# Allegro board LAYOUT.brd
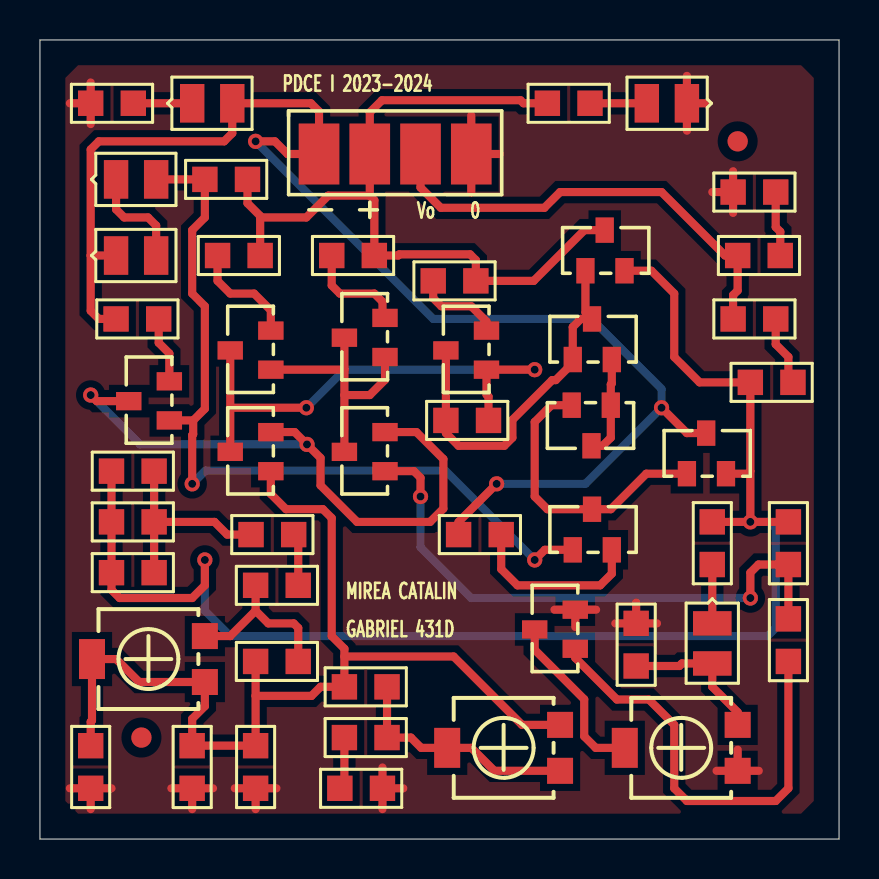
[diagram p0: board, top side]
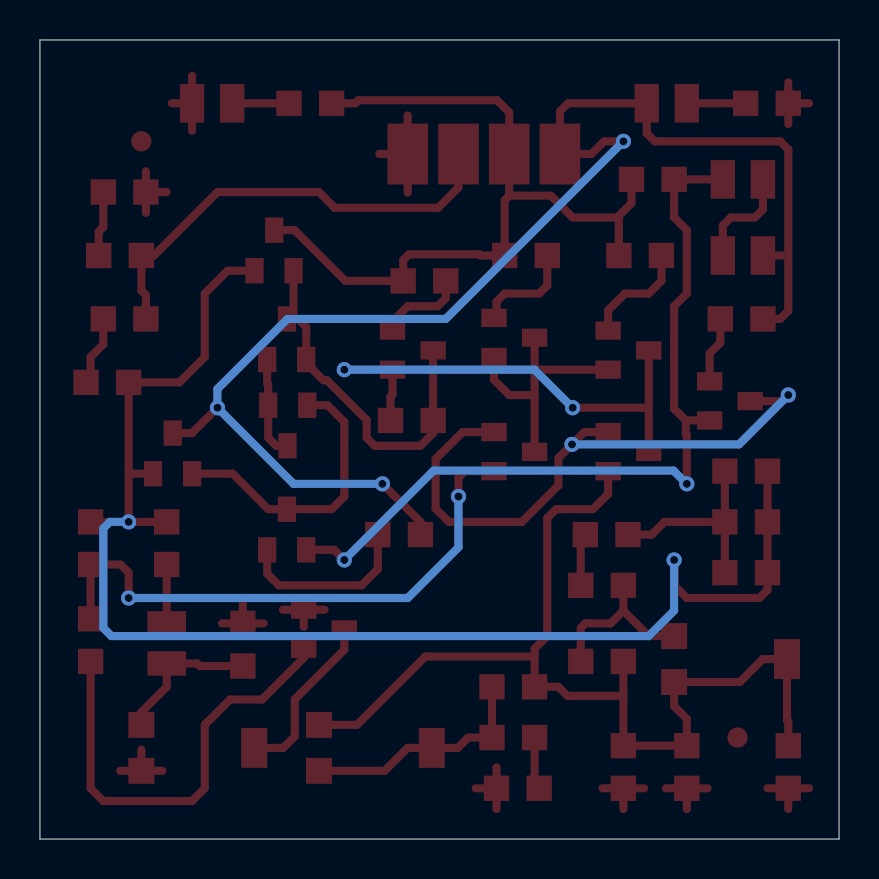
[diagram p1: board, bottom side, seen from below]

Outline 40 x 40 mm; copper layers: TOP, BOTTOM. Coordinates in mm from the lower left corner of the outline.
Outline path: 0,40 40,40 40,0 0,0 0,40

## Design rules (mm)
constraint set DEFAULT: min track width 0.406
nets with their own width: min track width 0.406; nets 0 INM INP VCC

## Placement (name value [footprint] x y rotation side)
C1  1n  [SMC0805]  5.71 18.41 180 top
C2  1n  [SMC0805]  20.32 20.95 0 top
C3  1n  [SMC0805]  7.62 2.54 90 top
C4  1n  [SMC0805]  5.71 15.88 180 top
C5  1n  [SMC0805]  5.71 13.34 180 top
C6  1n  [SMC0805]  2.54 2.54 90 top
C7  1n  [SMC0805]  10.79 2.54 90 top
C77  1u  [SMC0805]  29.84 10.79 270 top
D5  1N4148  [SMD0805]  33.66 10.79 270 top
J1  CON4  [JUMPER4]  13.97 34.29 0 top
LED  1N4148  [SMD0805]  32.38 36.83 180 top
LED1  1N4148  [SMD0805]  7.62 36.83 0 top
NOREF  -  [unnamed]  34.92 34.92 0 top
NOREF#2  -  [#2]  0 0 90 top
NOREF#3  -  [#2]  40 0 90 top
NOREF#4  -  [#2]  0 0 0 top
NOREF#5  -  [unnamed]  5.08 5.08 0 top
NOREF#6  -  [#2]  0 40 0 top
P1  500k  [TS53YL]  34.92 5.71 0 top
P2  10k  [TS53YL]  26.04 5.71 0 top
P3  10k  [TS53YL]  8.26 10.16 0 top
Q10  QBC846B  [TO236]  26.67 14.61 270 top
Q11  QBC846B  [TO236]  28.57 21.59 90 top
Q12  QBC846B  [TO236]  26.67 24.13 270 top
Q14  QBC846B  [TO236]  11.43 18.41 0 top
Q15  QBC846B  [TO236]  6.35 20.95 0 top
Q16  QBC846B  [TO236]  17.14 18.41 0 top
Q17  QBC856B  [TO236]  17.14 24.13 0 top
Q18  QBC856B  [TO236]  11.43 23.5 0 top
Q19  QBC856B  [TO236]  22.23 23.5 0 top
Q20  QBC856B  [TO236]  32.38 18.41 270 top
Q22  QBC846B  [TO236]  27.3 28.57 270 top
R1  510  [SMR0805]  12.7 15.24 180 top
R2  22k  [SMR0805]  37.47 15.88 270 top
R3  380  [SMR0805]  3.81 26.04 0 top
R4  3.9k  [SMR0805]  8.26 33.02 0 top
R5  51  [SMR0805]  20.95 15.24 0 top
R14  51  [SMR0805]  8.89 29.21 0 top
R15  51  [SMR0805]  14.61 29.21 0 top
R16  510  [SMR0805]  15.24 5.08 0 top
R17  10k  [SMR0805]  37.47 8.89 90 top
R38  1k  [SMR0805]  33.66 15.88 270 top
R39  51  [SMR0805]  19.68 27.94 0 top
R40  6.8k  [SMR0805]  10.79 8.89 0 top
R41  6.8k  [SMR0805]  15.24 7.62 0 top
R42  100  [SMR0805]  17.14 2.54 180 top
R43  100  [SMR0805]  10.79 12.7 0 top
RD1  100  [SMR0805]  25.4 36.83 0 top
RD2  100  [SMR0805]  2.54 36.83 0 top
RL  22k  [SMR0805]  34.92 29.21 0 top
RL2  3.3k  [SMR0805]  36.83 32.38 180 top
RZ  68k  [SMR0805]  36.83 26.04 180 top
RZ1  22k  [SMR0805]  35.56 22.86 0 top
TA  JMMBFJ309LT1  [TO236]  26.67 9.53 0 top
U1  1N4148  [SMD0805]  3.81 33.02 0 top
U2  1N4148  [SMD0805]  3.81 29.21 0 top

## Library data of the parts
C1-C7 C77 = C
D5 LED LED1 U1 U2 = 1N4148_0
J1 = CON4: User Part Number: ***
P1-P3 = POT
Q10-Q12 Q14-Q16 Q22 = QBC846B_0
Q17-Q20 = QBC856B_0
R1-R5 R14-R17 R38-R43 RD1 RD2 RL RL2 RZ RZ1 = R
TA = JMMBFJ309LT1_0

## Footprints (pads in the part's own frame, mm; a bottom-side part is the same pattern mirrored in y, then rotated)
JUMPER4
  rect 2.032x3.048 smd: 1(0,0) 2(2.54,0) 3(5.08,0) 4(7.62,0)
SMC0805
  rect 1.27x1.27 smd: 1(0,0) 2(2.134,0)
SMD0805
  rect 1.219x1.93 smd: A(2.007,0) C(0,0)
SMR0805
  rect 1.27x1.27 smd: 1(0,0) 2(2.134,0)
TO236
  rect 1.27x0.914 smd: 1(0.127,0) 2(0.127,1.956) 3(-1.905,0.965)
TS53YL
  rect 1.3x1.3 smd: 1(0,0) 3(0,-2.3)
  rect 1.3x2 smd: 2(-5.65,-1.15)
unnamed
  round 1.016 smd: (0,0)

## Nets
VCC: J1.2 Q22.3 R4.2 R14.2 R15.2 R39.2 RD1.1
VEE: J1.1 LED1.A Q20.3 R3.1 R5.1 U2.C(2)
0: C3.1 C6.1 C7.1 C77.1 J1.4 LED.C(2) P1.3 R42.1 RD2.1 RL2.2 TA.2
INM: Q16.1 R2.2 R17.2
INP: C3.2 C6.2 C7.2 P2.1 P3.2(T) P3.3 Q14.1 R40.1 R41.1
REACTIE: C1.2 C4.2 C5.2 Q20.2 Q22.2 R2.1 R38.1 RZ1.1
VOUT: J1.3 RL.1 RZ.2
N149108: Q10.1 Q15.1 R4.1 U1.A
N149178: R16.1 R42.2
N149208: P2.2(T) P2.3 R16.2 R41.2
N149368: P1.2(T) TA.3
N149380: R17.1 TA.1
N149386: C77.2 D5.A P1.1
N149498: C2.1 Q12.1 Q12.3 Q19.3 Q22.1
N149514: C2.2 Q14.3 Q18.3 Q19.1
N149548: Q11.1 Q11.3 Q12.2
N149562: Q10.3 Q11.2 Q20.1
N149578: Q10.2 R5.2
N149716: RL.2 RL2.1
N149940: Q19.2 R39.1
N150018: U1.C(2) U2.A
N150066: C1.1 C4.1 C5.1 R1.2
N150166: R1.1 R43.2
N150270: P3.1 R40.2 R43.1
N150406: RZ.1 RZ1.2
N150512: LED1.C(2) RD2.2
N150752: LED.A RD1.2
N150862: Q14.2 Q15.3 Q16.2
N150878: Q16.3 Q17.1 Q17.3 Q18.1
N150890: Q18.2 R14.1
N150950: Q17.2 R15.1
N150996: Q15.2 R3.2
N1494200: D5.C(2) R38.2

## Via types
v1: diameter 0.762, hole 0.4, TOP to BOTTOM, 13 vias

## Routing (per net, layer and track width the routed paths; a pad name or vN(x,y) marks a point on that pad's centre or on a via; arc(x,y) is an arc through that point)
VCC: length 40.2
  TOP w0.406: 11.02,31.11 13.34,31.11 14.43,32.21 16.51,32.21 ; 11.02,31.11 11.02,31.19 10.39,31.83 R4.2 ; 11.02,31.11 R14.2 ; Q22.3 27.25,30.48 24.71,27.94 R39.2 21.82,28.98 21.53,29.27 17.99,29.27 17.93,29.21 R15.2 16.74,31.98 16.51,32.21 ; 16.51,32.21 J1.2 16.51,36.37 17.12,36.98 24.05,36.98 24.21,36.83 RD1.1
VEE: length 72.1
  TOP w0.406: Q20.3 32.38,20.32 v1(31.11,21.59) ; 2.54,29.21 2.54,34.52 2.95,34.92 9.22,34.92 9.63,35.33 LED1.A 13.56,36.83 13.97,36.42 J1.1 12.4,34.29 11.76,34.92 v1(10.79,34.92) ; 2.54,29.21 2.54,26.44 2.95,26.04 R3.1 ; 2.54,29.21 U2.C ; R5.1 20.95,15.88 v1(22.86,17.78)
  BOTTOM w0.406: v1(10.79,34.92) 19.68,26.04 27.61,26.04 31.11,22.53 v1(31.11,21.59) 27.3,17.78 v1(22.86,17.78)
0: length 37
  TOP w0.406: C6.1 3.58,2.54 ; C6.1 1.5,2.54 ; C6.1 2.54,1.5 ; C77.1 29.84,11.84 ; C77.1 30.89,10.79 ; C77.1 28.8,10.79 ; C3.1 8.66,2.54 ; C3.1 7.62,1.5 ; C3.1 6.58,2.54 ; 9.75,2.54 C7.1 ; C7.1 11.84,2.54 ; C7.1 10.79,1.5 ; 33.65,32.38 RL2.2 ; RL2.2 34.7,31.34 ; RL2.2 34.7,33.43 ; 21.59,32.36 J1.4 ; J1.4 23.01,34.29 ; J1.4 21.59,36.22 ; 2.54,35.79 RD2.1 ; RD2.1 1.5,36.83 ; RD2.1 2.54,37.87 ; 17.14,1.5 R42.1 ; R42.1 18.19,2.54 ; R42.1 17.14,3.58 ; LED.C 32.38,38.2 ; LED.C 33.4,36.83 ; LED.C 32.38,35.46 ; 26.8,10.62 TA.2 ; TA.2 27.84,11.48 ; TA.2 25.76,11.48 ; 33.87,3.42 P1.3 ; P1.3 34.92,4.47 ; P1.3 35.98,3.42
INM: length 29
  TOP w0.406: v1(35.56,12.06) 35.56,13.34 35.97,13.74 R2.2 R17.2 ; Q16.1 18.72,18.41 19.05,18.08 v1(19.05,17.14)
  BOTTOM w0.406: v1(35.56,12.06) 21.59,12.06 19.05,14.61 v1(19.05,17.14)
INP: length 51.6
  TOP w0.406: P2.1 24.13,5.71 20.71,9.14 15.24,9.14 ; R40.1 10.79,7.17 ; 10.79,7.17 13.59,7.17 14.05,7.62 R41.1 15.24,9.14 ; 10.79,7.17 C7.2 C3.2 7.62,6.02 8.26,6.65 P3.3 4.96,7.86 3.81,9.01 P3.2 2.61,5.93 2.54,5.87 C6.2 ; 15.24,9.14 15.24,9.53 14.61,10.16 14.61,16.07 14.16,16.51 12.32,16.51 11.56,17.27 Q14.1
REACTIE: length 73.1
  TOP w0.406: v1(35.56,15.88) 35.56,18.41 ; v1(35.56,15.88) R2.1 ; v1(35.56,15.88) R38.1 ; 35.56,18.41 35.43,18.29 Q20.2 ; 35.56,18.41 RZ1.1 33.02,22.86 31.75,24.13 31.75,27.3 30.61,28.45 Q22.2 ; v1(8.26,13.97) 8.26,12.7 7.62,12.06 3.99,12.06 3.58,12.47 C5.2 C4.2 C1.2
  BOTTOM w0.406: v1(8.26,13.97) 8.26,11.43 9.53,10.16 36.42,10.16 36.83,10.57 36.83,15.54 36.5,15.88 v1(35.56,15.88)
VOUT: length 22.9
  TOP w0.406: RZ.2 34.7,27.23 34.92,27.46 RL.1 34.29,29.21 31.11,32.38 26.04,32.38 25.25,31.6 20.07,31.6 19.05,32.61 J1.3
N149108: length 41.1
  TOP w0.406: v1(24.77,13.97) 25.27,14.48 Q10.1 ; v1(7.62,17.78) 7.62,20.22 7.67,20.27 7.67,20.95 ; 7.67,20.95 Q15.1 ; 7.67,20.95 8.26,21.54 8.26,26.67 7.62,27.3 7.62,30.48 8.26,31.11 R4.1 U1.A
  BOTTOM w0.406: v1(24.77,13.97) 20.29,18.44 8.28,18.44 v1(7.62,17.78)
N149178: length 2.6
  TOP w0.406: R42.2 15.24,2.77 R16.1
N149208: length 11.9
  TOP w0.406: R41.2 R16.2 18.57,5.08 19.08,4.56 P2.2 21.59,4.56 22.74,3.42 P2.3
N149368: length 8.6
  TOP w0.406: P1.2 27.82,4.56 27.24,5.14 27.24,7 24.77,9.47 TA.3
N149380: length 22.6
  TOP w0.406: TA.1 26.8,9.07 28.88,6.99 30.48,6.99 31.75,5.71 31.75,2.54 32.38,1.91 36.83,1.91 37.47,2.54 R17.1
N149386: length 7.5
  TOP w0.406: C77.2 32,8.66 32.13,8.79 D5.A 33.66,7.62 34.92,6.35 P1.1
N149498: length 18.5
  TOP w0.406: Q22.1 27.3,26.37 Q12.3 27.08,26.04 26.67,25.63 Q12.1 26.67,23.83 25.82,22.97 25.64,22.97 23.65,20.98 23.65,20.09 23.24,19.68 20.95,19.68 20.32,20.32 C2.1 Q19.3
N149514: length 26.1
  TOP w0.406: Q14.3 9.53,21.59 ; 9.53,21.59 v1(13.34,21.59) ; 9.53,21.59 Q18.3 ; C2.2 22.45,22.15 22.35,22.25 Q19.1 v1(24.77,23.5)
  BOTTOM w0.406: v1(24.77,23.5) 15.24,23.5 v1(13.34,21.59)
N149548: length 5.1
  TOP w0.406: Q11.3 28.17,19.68 28.57,20.09 Q11.1 28.57,22.76 28.63,22.81 Q12.2
N149562: length 14.6
  TOP w0.406: Q20.1 30.35,18.29 28.57,16.51 Q10.3 25.4,16.51 24.77,17.14 24.77,20.88 25.6,21.72 Q11.2
N149578: length 9
  TOP w0.406: R5.2 23.09,13.51 23.9,12.7 28.04,12.7 28.63,13.28 Q10.2
N149716: length 3.3
  TOP w0.406: RL2.1 36.83,30.63 37.06,30.4 RL.2
N149940: length 4.5
  TOP w0.406: Q19.2 22.35,25.91 21.59,26.67 20.09,26.67 19.68,27.08 R39.1
N150018: length 5.3
  TOP w0.406: U1.C 3.81,31.52 4.22,31.11 5.41,31.11 5.82,30.71 U2.A
N150066: length 10.2
  TOP w0.406: C4.1 8.74,15.88 9.37,15.24 R1.2 ; C4.1 C1.1 ; C4.1 C5.1
N150166: length 2.6
  TOP w0.406: R1.1 12.93,15.01 R43.2
N150270: length 8.5
  TOP w0.406: P3.1 9.53,10.16 10.79,11.43 ; 10.79,11.43 11.43,10.79 12.7,10.79 12.93,10.57 R40.2 ; 10.79,11.43 R43.1
N150406: length 3.5
  TOP w0.406: RZ1.2 37.47,23.09 37.47,24.13 36.83,24.77 RZ.1
N150512: length 2.9
  TOP w0.406: LED1.C RD2.2
N150752: length 2.8
  TOP w0.406: LED.A RD1.2
N150862: length 31.4
  TOP w0.406: Q15.3 2.84,21.92 v1(2.54,22.23) ; Q16.2 18.84,20.37 20.19,19.02 20.19,16.54 19.53,15.88 15.88,15.88 14.05,17.7 14.05,19.08 v1(13.37,19.75) 12.75,20.37 Q14.2
  BOTTOM w0.406: v1(2.54,22.23) 5.01,19.75 v1(13.37,19.75)
N150878: length 12.9
  TOP w0.406: 15.24,22.23 16.51,22.23 17.27,22.99 Q17.1 ; 15.24,22.23 15.24,23.5 ; 15.24,22.23 Q16.3 ; Q18.1 15.24,23.5 ; 15.24,23.5 Q17.3
N150890: length 5.6
  TOP w0.406: R14.1 8.89,27.94 9.53,27.3 10.72,27.3 11.56,26.47 Q18.2
N150950: length 5.2
  TOP w0.406: Q17.2 17.14,26.21 17.14,26.9 16.74,27.3 15.01,27.3 14.61,27.71 R15.1
N150996: length 3.3
  TOP w0.406: R3.2 5.94,24.84 6.48,24.31 Q15.2
N1494200: length 2.9
  TOP w0.406: R38.2 D5.C

## Copper pours and planes (outline as drawn; the poured copper is in the pictures)
0 on TOP: 1.27,38.1 1.91,38.73 38.1,38.73 38.73,38.1 38.73,1.91 38.1,1.27 1.91,1.27 1.27,1.91 ; 19 cut-outs

## Text on the board
Ref Des/Silkscreen Top: PDCE I 2023-2024 | MIREA CATALIN | GABRIEL 431D | Vo | 0
NCLEGEND-1-2: FIGURE | SIZE | 15.74 | DRILL CHART: TOP to BOTTOM | ALL UNITS ARE IN MILS | PLATED | QTY | 13
XSECTION_CHART: *  SURFACE - AIR 0 MIL | L1: TOP CONDUCTOR - COPPER 1.38 MIL | *  DIELECTRIC - FR-4 60.24 MIL | L2: BOTTOM CONDUCTOR - COPPER 1.38 MIL | DESIGN CROSS SECTION CHART | ___________________________ | TOTAL THICKNESS 63 MIL | 1-2
